# Altium PCB PCB1.PcbDoc
Units mil, origin at the board's own origin, x right, y up, seen from the top; angles counter-clockwise.
Board outline 2700 x 2100 mil, 2 copper layers (Top Layer, Bottom Layer), stack 62.8 mil thick; 15 components, 32 nets, 62 pads, 7 vias.
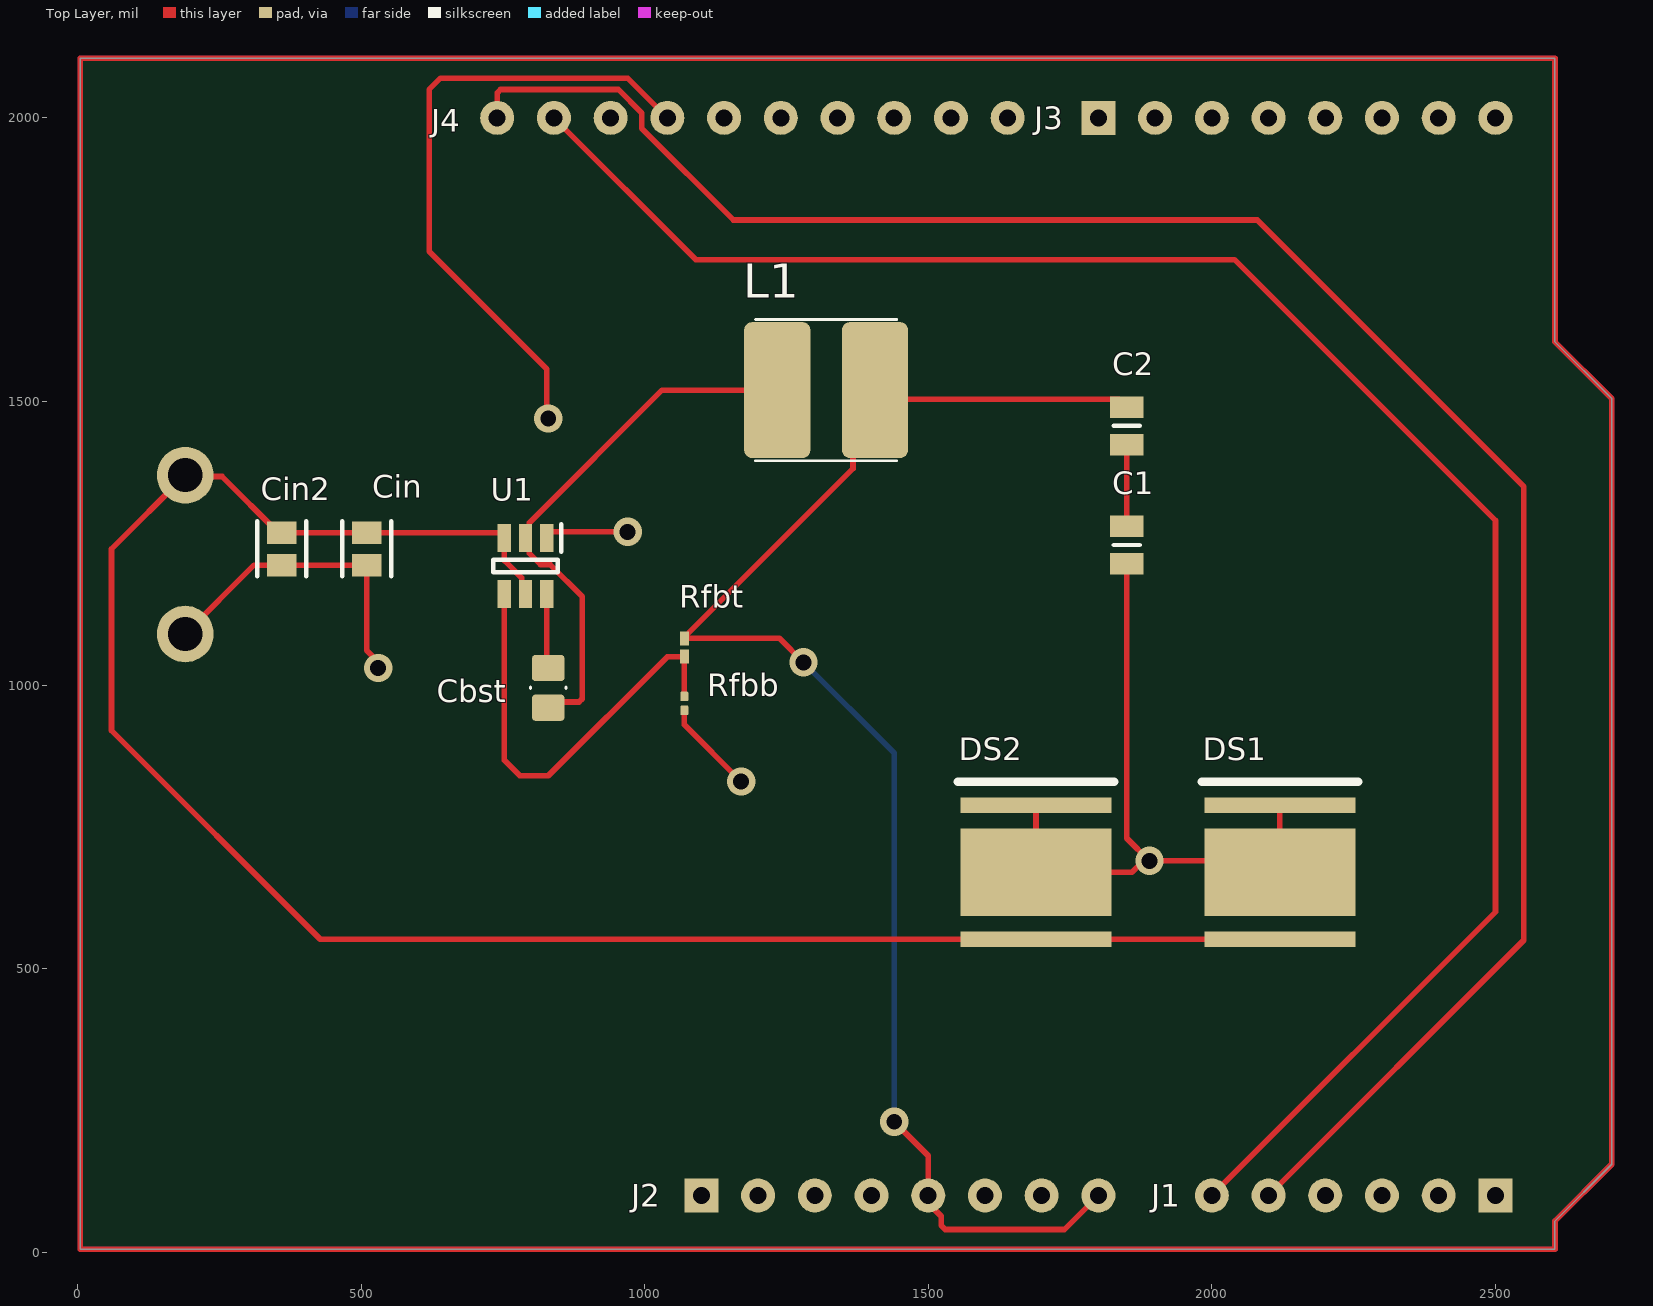
[diagram p0: Top Layer view]
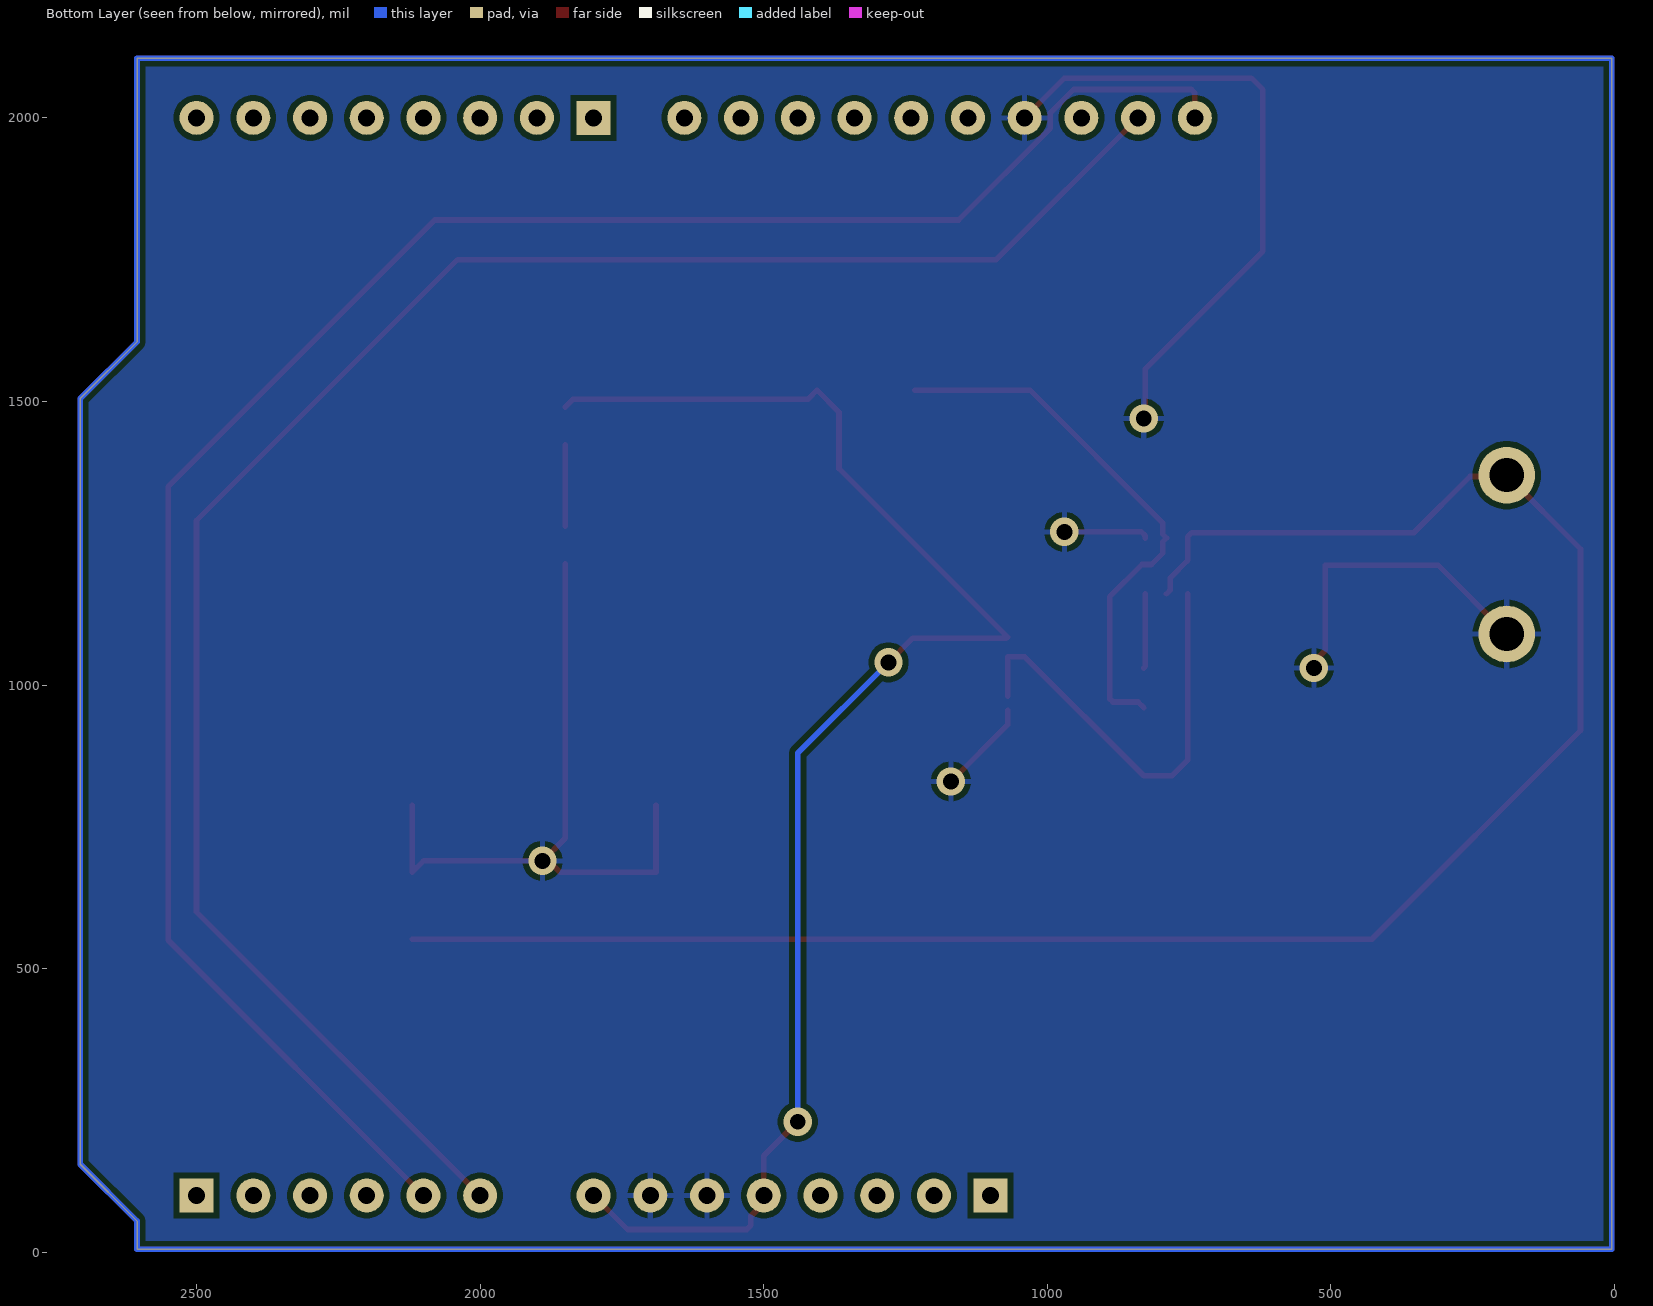
[diagram p1: Bottom Layer view, seen from below]

## Layer stack, top to bottom
Top Solder: solder mask 0.4, Solder Resist, Dk 3.5
Top Layer: signal copper 1.4
Dielectric 1: dielectric 60, FR-4, Dk 4.8
Bottom Layer: signal copper 1.4
Bottom Solder: solder mask 0.4, Solder Resist, Dk 3.5

## Board outline
5,5 5,2105 2605,2105 2605,1605 2705,1505 2705,155 2605,55 2605,5

## Design rules (kind name [scope] priority, off if disabled: settings)
Clearance [All] p1: gap=10 ignorepadtopadclearanceinfootprint=TRUE
PolygonConnect [All] p1: connectstyle=Relief reliefconductorwidth=10 reliefentries=4 polygonreliefangle="90 Angle" airgapwidth=10
RoutingVias [All] p1: holewidth=28 width=50 viastyle="Through Hole" minholewidth=28 minwidth=50 maxholewidth=28 maxwidth=50
SolderMaskExpansion [All] p1: expansion=0 istentingtop=FALSE
SupplyNets "Schematic Supply Nets_2" [InNet('+12')] p1: voltage=0.000
SupplyNets "Schematic Supply Nets_1" [InNet('GND')] p2: voltage=0.000
SupplyNets "Schematic Supply Nets" [InNet('+5')] p3: voltage=0.000
Width [All] p1: maxlimit=10 minlimit=10 preferedwidth=10
30 further rules are at their usual default settings.

## Components (designator, comment, footprint, x,y, rotation, side; value= is the part's Value field where it differs from the comment)
C1 "22uf" CAPC2114X95N 1850,1246.93 r90 top
C2 "22uf" CAPC2114X95N 1850,1456.93 r90 top
Cbst "08053C104KAT2A" CAPC2012X75N 830,995.06 r270 top value=100nF
Cin "10uf" FP-GRM21B-0_15-IPC_C 510,1240 r270 top
Cin2 "10uf" FP-GRM21B-0_15-IPC_C 360,1240 r270 top
DS1 "MKRAWT-00-0000-0D0HH235H" CREE-MK-R-2_V 2120,670 r90 top
DS2 "MKRAWT-00-0000-0D0HH235H" CREE-MK-R-2_V 1690,670 r90 top
J1 "1x6 header" "1x6 header" 2500,100 r180 top locked
J2 "1x8 header" "1x8 header" 1100,100 r0 top locked
J3 "1x8 header" "1x8 header" 1800,2000 r0 top locked
J4 "1x10 header" "1x10 pin header" 740,2000 r0 top locked
L1 "SRN6045-4R7Y" INDP6060X450N 1320,1520 r0 top value=4.7µH
Rfbb "RC0201FR-0710KL" RESC0603X26N#1 1070,967.7 r270 top value=10k
Rfbt "RC0201FR-0756K2L" RESC0603X26N#2 1070,1066.22 r270 top
U1 "TPS562200DDCR" SOT95P280X110-6N 790,1210 r270 top

## Footprints (in the part's own frame and the unit in brackets; to place one, negate y for a bottom-side part, rotate by r counter-clockwise, add the part's x,y. Pads: shape width x height; smd on the part's side, far side on the other; paste and mask are expansions set on the pad)
"1x6 header" [mil]
  rect 60x60 hole 30: 1(0,0)
  round 60 hole 30: 2(100,0) 3(200,0) 4(300,0) 5(400,0) 6(500,0)
"1x8 header" [mil]
  rect 60x60 hole 30: 1(0,0)
  round 60 hole 30: 2(100,0) 3(200,0) 4(300,0) 5(400,0) 6(500,0) 7(600,0) 8(700,0)
"1x10 pin header" [mil]
  round 60 hole 30: 1(0,0) 2(100,0) 3(200,0) 4(300,0) 5(400,0) 6(500,0) 7(600,0) 8(700,0) 9(800,0) 10(900,0)
CAPC2012X75N [mm] "Chip Capacitor, 2-Leads, Body 2.01x1.25mm, IPC Medium Density"
  rrect25% 1.175x1.45 smd: 1(-0.887,0) 2(0.888,0)
  silkscreen extent -0.04,-0.79 0.04,0.79, body extent -1.1,-0.72 1.11,0.72, height 0.75
CAPC2114X95N [mm]
  rect 0.96x1.49 smd: 1(-0.84,0) 2(0.84,0)
  silkscreen extent 0,-0.58 0,0.58, body extent -1.05,-0.67 1.05,0.67, height 0.95
CREE-MK-R-2_V [mm] "SMD, 2-Leads, Body 7x7mm, Thermal Pad 3.9x6.76mm"
  rect 0.7x6.76 smd: 1(-3,0) 2(3,0)
  rect 3.9x6.76 smd: 3(0,0)
  silkscreen extent 4.05,-3.5 4.05,3.5, body extent -3.5,-3.5 3.5,3.5, height 4.1
FP-GRM21B-0_15-IPC_C [mil]
  rect 39.6x51.5 smd paste+0 mask+0: 1(-28.59,0) 2(28.59,0)
  silkscreen extent -48,-43 48,43, body extent -52,-31 52,31, height 10
INDP6060X450N [mm] "Precision Wire Wound Inductor, 2-Leads, Body 6.00x6.00mm, IPC Medium Density"
  rrect25% 2.975x6.1 smd: 1(-2.187,0) 2(2.188,0)
  silkscreen extent -3.16,-3.16 3.16,3.16, body extent -3.1,-3.1 3.1,3.1, height 4.5
RESC0603X26N#1 [mm] "Chip Resistor, 2-Leads, Body 0.60x0.30mm, IPC Medium Density"
  rrect25% 0.425x0.35 smd: 1(-0.312,0) 2(0.313,0)
  body extent -0.31,-0.16 0.32,0.17, height 0.26
RESC0603X26N#2 [mm]
  rect 0.625x0.4 smd: 1(-0.412,0) 2(0.412,0)
SOT95P280X110-6N [mm]
  rect 1.25x0.6 smd: 1(-1.25,0.95) 2(-1.25,0) 3(-1.25,-0.95) 4(1.25,-0.95) 5(1.25,0) 6(1.25,0.95)
  silkscreen extent -1.88,-1.45 0.28,1.6, body extent -1.4,-1.45 1.4,1.45, height 0.97

## Part data
C1 C2: library part MSASL219LB5226MTNA01, "Capacitor", Manufacturer_Name="TAIYO YUDEN", Datasheet Link=https://4donline.ihs.com/images/VipMasterIC/IC/TAIY/TAIY-S-A0026212580/TAIY-S-A0026212609-1.pdf?hkey=61A2E4C270F0397D049F8F05BD4F1054, Height=0.95mm, Manufacturer_Part_Number=MSASL219LB5226MTNA01
Cbst: library part CMP-001-00084-1, "25V 100nF X7R 卤10% 0805 Multilayer Ceramic Capacitors MLCC - SMD/SMT ROHS", Case/Package=0805, Max Operating Temperature=125°C, Min Operating Temperature=-55°C, Tolerance=10%, Voltage Rating=25V, Mounting Technology="Surface Mount", Pins=2
Cin Cin2: library part CMP-2007-03541-2, "Chip Multilayer Ceramic Capacitors for General Purpose, 0805, 10uF, X5R, 15%, 10%, 25V", Capacitance=10uF, Case Code (Imperial)=0805, Case Code (Metric)=2012, Dielectric=X5R, Max Operating Temperature=85°C, Min Operating Temperature=-55°C, Package Quantity=1, Tolerance=10%, Voltage=25V, Case/Package=0805, Depth=1.25mm, Height=1.25mm, Lead Free="Lead Free", Length=2mm, Material=Ceramic, Mount="Surface Mount", Packaging="Tape and Reel", Radiation Hardening=No, Termination=SMD/SMT, Thickness=0.053inch, Voltage Rating=25V, Voltage Rating (DC)=25V, Width=0.049inch
DS1 DS2: library part CMP-2100-00975-1, "LED, White, 12 V, 2-Pin SMD, RoHS, Tape and Reel"
J1: library part "6 pin header", "1x6 pin header"
J2 J3: library part "8 pin header", "1x8 header pin"
J4: library part "10 pin header", "1x10 header pin"
L1: library part CMP-006-00021-2, "Inductor Power Semi-Shielded Wirewound 4.7uH 30% 100KHz 15Q-Factor Ferrite 3A 0.0376Ohm DCR T/R", Case/Package=2424, Current Rating=3A, Max Operating Temperature=125°C, Min Operating Temperature=-40°C, Self Resonant Frequency=22MHz, Tolerance=30%, Max Current Rating=3A, Mounting Technology="Surface Mount", Pins=2
Rfbb: library part CMP-009-00177-1, "Res Thick Film 0201 10K Ohm 1% 0.05W(1/20W) ±200ppm/C Pad SMD T/R", Case/Package=0201, Max Operating Temperature=125°C, Min Operating Temperature=-55°C, Tolerance=1%, Voltage Rating=25V, Mounting Technology="Surface Mount", Pins=2
Rfbt: "Resistor", Manufacturer_Name="Yageo Group", Mouser Part Number=603-RC0201FR-0756K2L, Arrow Part Number=RC0201FR-0756K2L, Arrow Price/Stock=https://www.arrow.com/en/products/rc0201fr-0756k2l/yageo?region=nac, Datasheet Link=https://www.yageo.com/upload/media/product/productsearch/datasheet/rchip/PYu-RC_Group_51_RoHS_L_12.pdf, Height=0.26mm, Manufacturer_Part_Number=RC0201FR-0756K2L, Mouser Price/Stock=https://www.mouser.co.uk/ProductDetail/YAGEO/RC0201FR-0756K2L?qs=Q4gDqC5t5%2FD3%2Fkjmz2Nr%2Fw%3D%3D
U1: "Undefined or Miscellaneous", Manufacturer_Name="Texas Instruments", Mouser Part Number=595-TPS562200DDCR, Arrow Part Number=TPS562200DDCR, Arrow Price/Stock=https://www.arrow.com/en/products/tps562200ddcr/texas-instruments?utm_currency=USD&region=europe, Datasheet Link=http://www.ti.com/lit/gpn/tps562200, Height=1.1mm, Manufacturer_Part_Number=TPS562200DDCR, Mouser Price/Stock=https://www.mouser.co.uk/ProductDetail/Texas-Instruments/TPS562200DDCR?qs=7wMBv%2Ftbz9Jdis0htpD4wA%3D%3D

## Free pads (board coordinates)
  round 100 hole 60: 31(190,1370) 32(190,1090)

## Via types
v1: diameter 50, hole 28, Top Layer to Bottom Layer, 7 vias

## Nets (pads, with @x,y where several pads share a name; then routed paths per layer and width w, separated by ;. In a path a pad name is that pad's centre, name@x,y a point inside that pad or via, vN(x,y) a via of type N, cw(c..) or ccw(c..) an arc to the next point about the centre after c; other vN are vias at no path point)
3.3V: J2.4
+5: C2.2 J2.5 J2.8 L1.2 Rfbt.1 | length 2653.5
  Top Layer w10: Rfbt.1@1070,1084.43 1071.99,1082.44 1237.56,1082.44 v1(1280,1040) ; Rfbt.1@1073.11,1087.54 1367.2,1381.63 1367.2,1481.08 L1.2 1422.22,1503.9 1836.1,1503.9 C2.2 ; v1(1440,230) 1500,170 J2.5 1500,86.47 1522.93,63.54 1522.93,47.07 1530,40 1740,40 J2.8
  Bottom Layer w10: v1(1280,1040) 1440,880 v1(1440,230)
+12: Cin2.1 Cin.1 DS1.1 DS2.1 pad.31 U1.3 U1.5 | length 3440.2
  Top Layer w10: U1.5 783.19,1167.6 783.19,1189.02 752.6,1219.61 U1.3 752.6,1261.78 745.79,1268.59 Cin.1 Cin2.1 354.05,1268.59 255,1367.64 192.36,1367.64 pad.31 60,1240 60,920 428.11,551.89 DS2.1 DS1.1
A0: J1.1
A1: J1.2
A2: J1.3
A3: J1.4
A4: J1.5 J4.1 | length 3598.9
  Top Layer w10: J4.1 740,2044.14 745.86,2050 953.64,2050 995,2008.64 995,1981.36 1156.36,1820 2080,1820 2550,1350 2550,550 J1.5
A5: J1.6 J4.2 | length 3351.2
  Top Layer w10: J4.2 1090,1750 2040,1750 2500,1290 2500,600 J1.6
AREF: J4.3
D0: J3.8
D1: J3.7
D2: J3.6
D3: J3.5
D4: J3.4
D5: J3.3
D6: J3.2
D7: J3.1
D8: J4.10
D9: J4.9
D10: J4.8
D11: J4.7
D12: J4.6
D13: J4.5
GND: C1.1 Cin2.2 Cin.2 DS1.2 DS1.3 DS2.2 DS2.3 J2.6 J2.7 J4.4 pad.32 Rfbb.2 U1.1 | length 3234.5
  Top Layer w10: pad.32 311.41,1211.41 Cin2.2 Cin.2 510,1060.82 530,1040.82 v1(530,1030) v1@540.82,1030 ; U1.1 827.4,1263.19 834.21,1270 v1(970,1270) ; v1(830,1470) 827.4,1472.6 827.4,1557.3 620,1764.7 620,2050 640,2070 970,2070 J4.4 ; Rfbb.2 1070,930 v1(1170,830) ; DS2.2 DS2.3 1859.18,670 1879.18,690 v1(1890,690) ; C1.1 1850,730 v1(1890,690) ; DS1.2 DS1.3 2100,690 v1(1890,690)
IOREF: J2.2
N-C: J2.1
NetC1_2: C1.2 C2.1 | length 143.9
  Top Layer w10: C1.2 C2.1
NetCbst_1: Cbst.1 U1.6 | length 131.9
  Top Layer w10: U1.6 827.4,1032.6 Cbst.1
NetRfbb_1: Rfbb.1 Rfbt.2 U1.4 | length 779.1
  Top Layer w10: U1.4 752.6,867.4 780,840 830,840 1040,1050 Rfbt.2 Rfbb.1
RESET: J2.3
sout: Cbst.2 L1.1 U1.2 | length 964.9
  Top Layer w10: Cbst.2 839.88,970 884.14,970 890,975.86 890,1155.82 833.28,1212.54 816.44,1212.54 796.81,1232.17 796.81,1252.4 U1.2 796.81,1266.02 796.81,1286.25 1030.56,1520 L1.1

## Polygon pours and split planes (outlines as drawn)
GND on Bottom Layer "GND_L02_P001" (solid, pour order 1): 5,2105 2605,2105 2605,1605 2705,1505 2705,155 2605,55 2605,5 5,5

## Other copper
Multi-Layer:
  the board outline again, w10